# Altium PCB PCB1.PcbDoc
Units mil, origin at the board's own origin, x right, y up, seen from the top; angles counter-clockwise.
Board outline 1920 x 2210 mil, 2 copper layers (Top Layer, Bottom Layer); 8 components, 6 nets, 52 pads, 5 vias.
Unrouted connection lines stored in the file: 8.
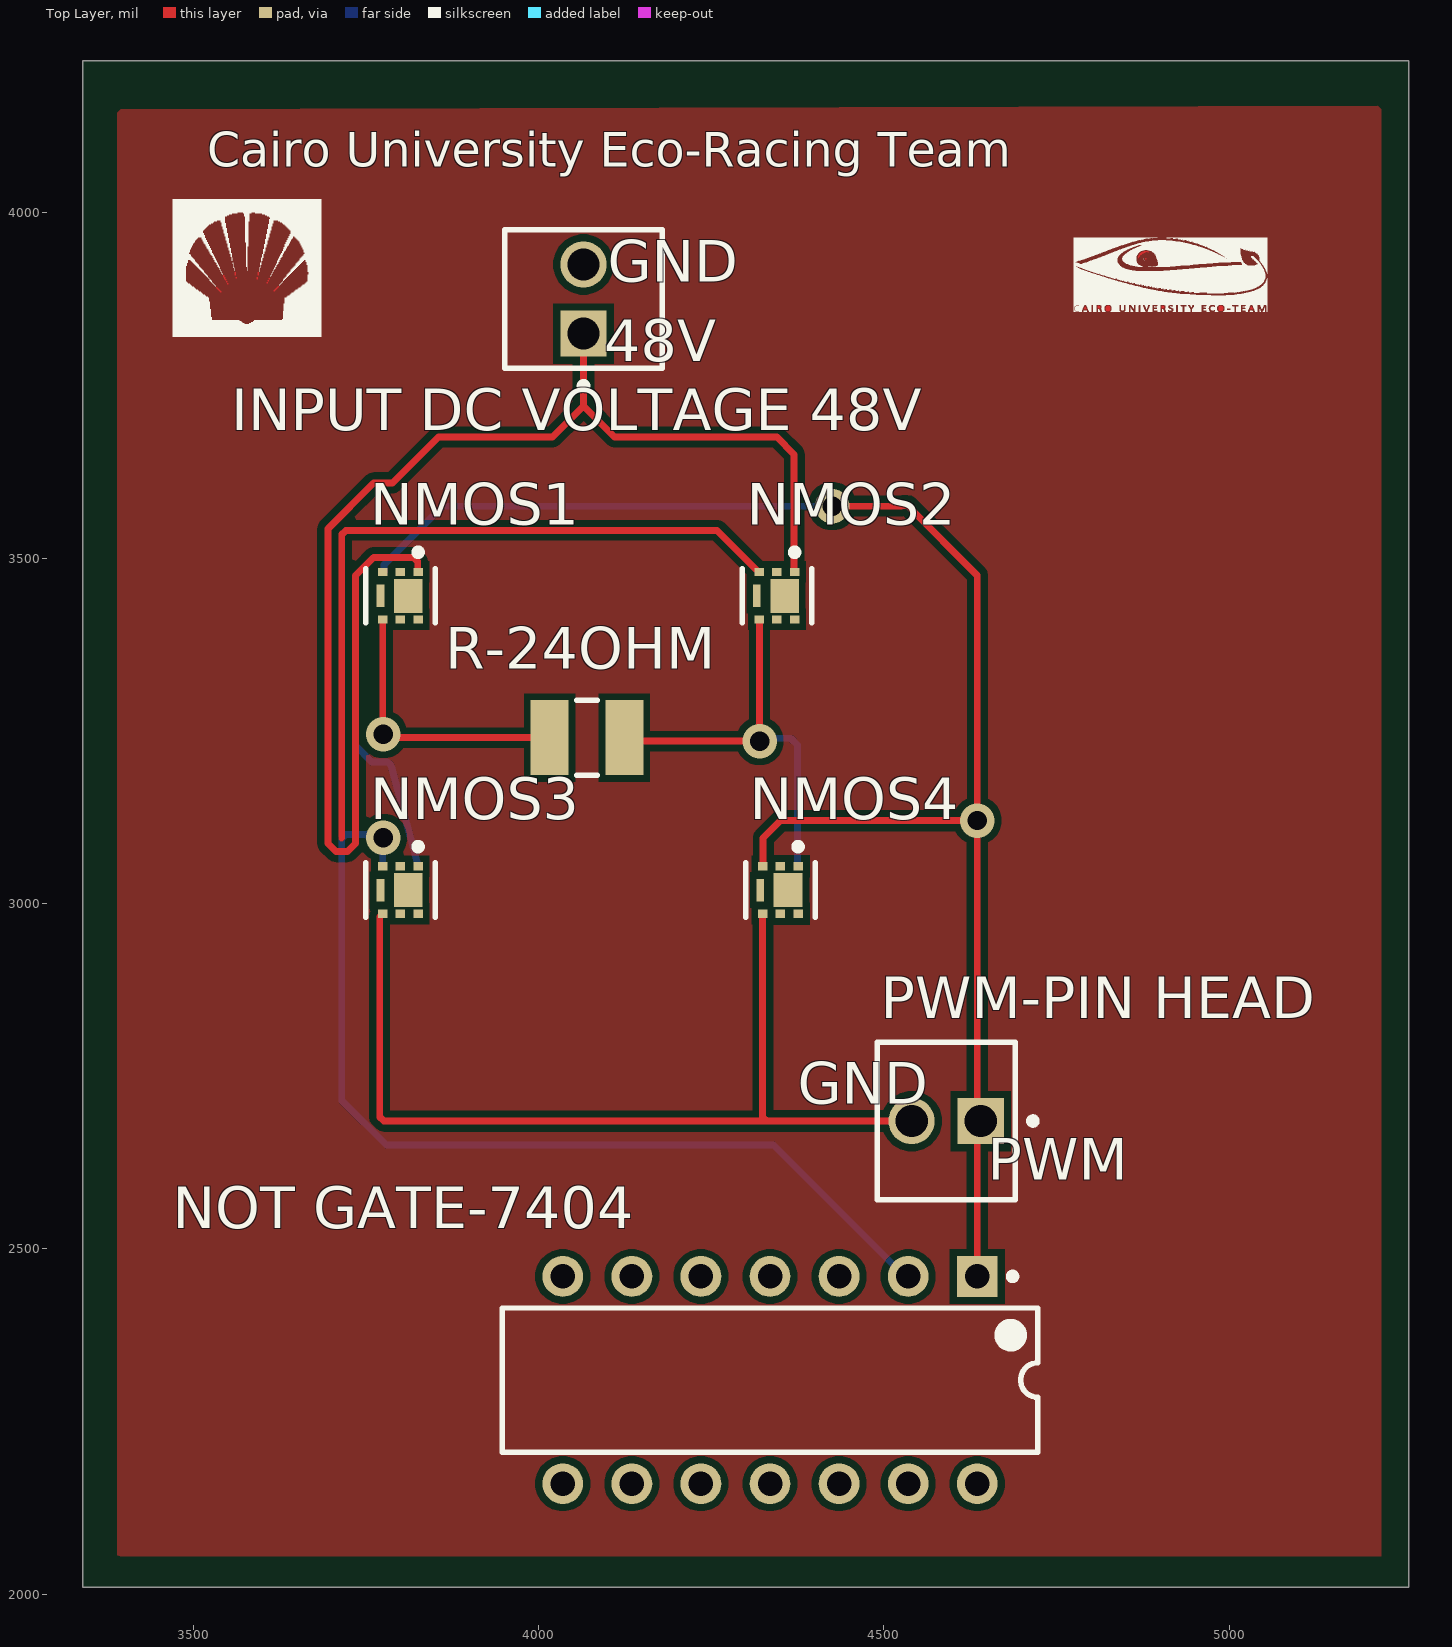
[diagram p0: Top Layer view]
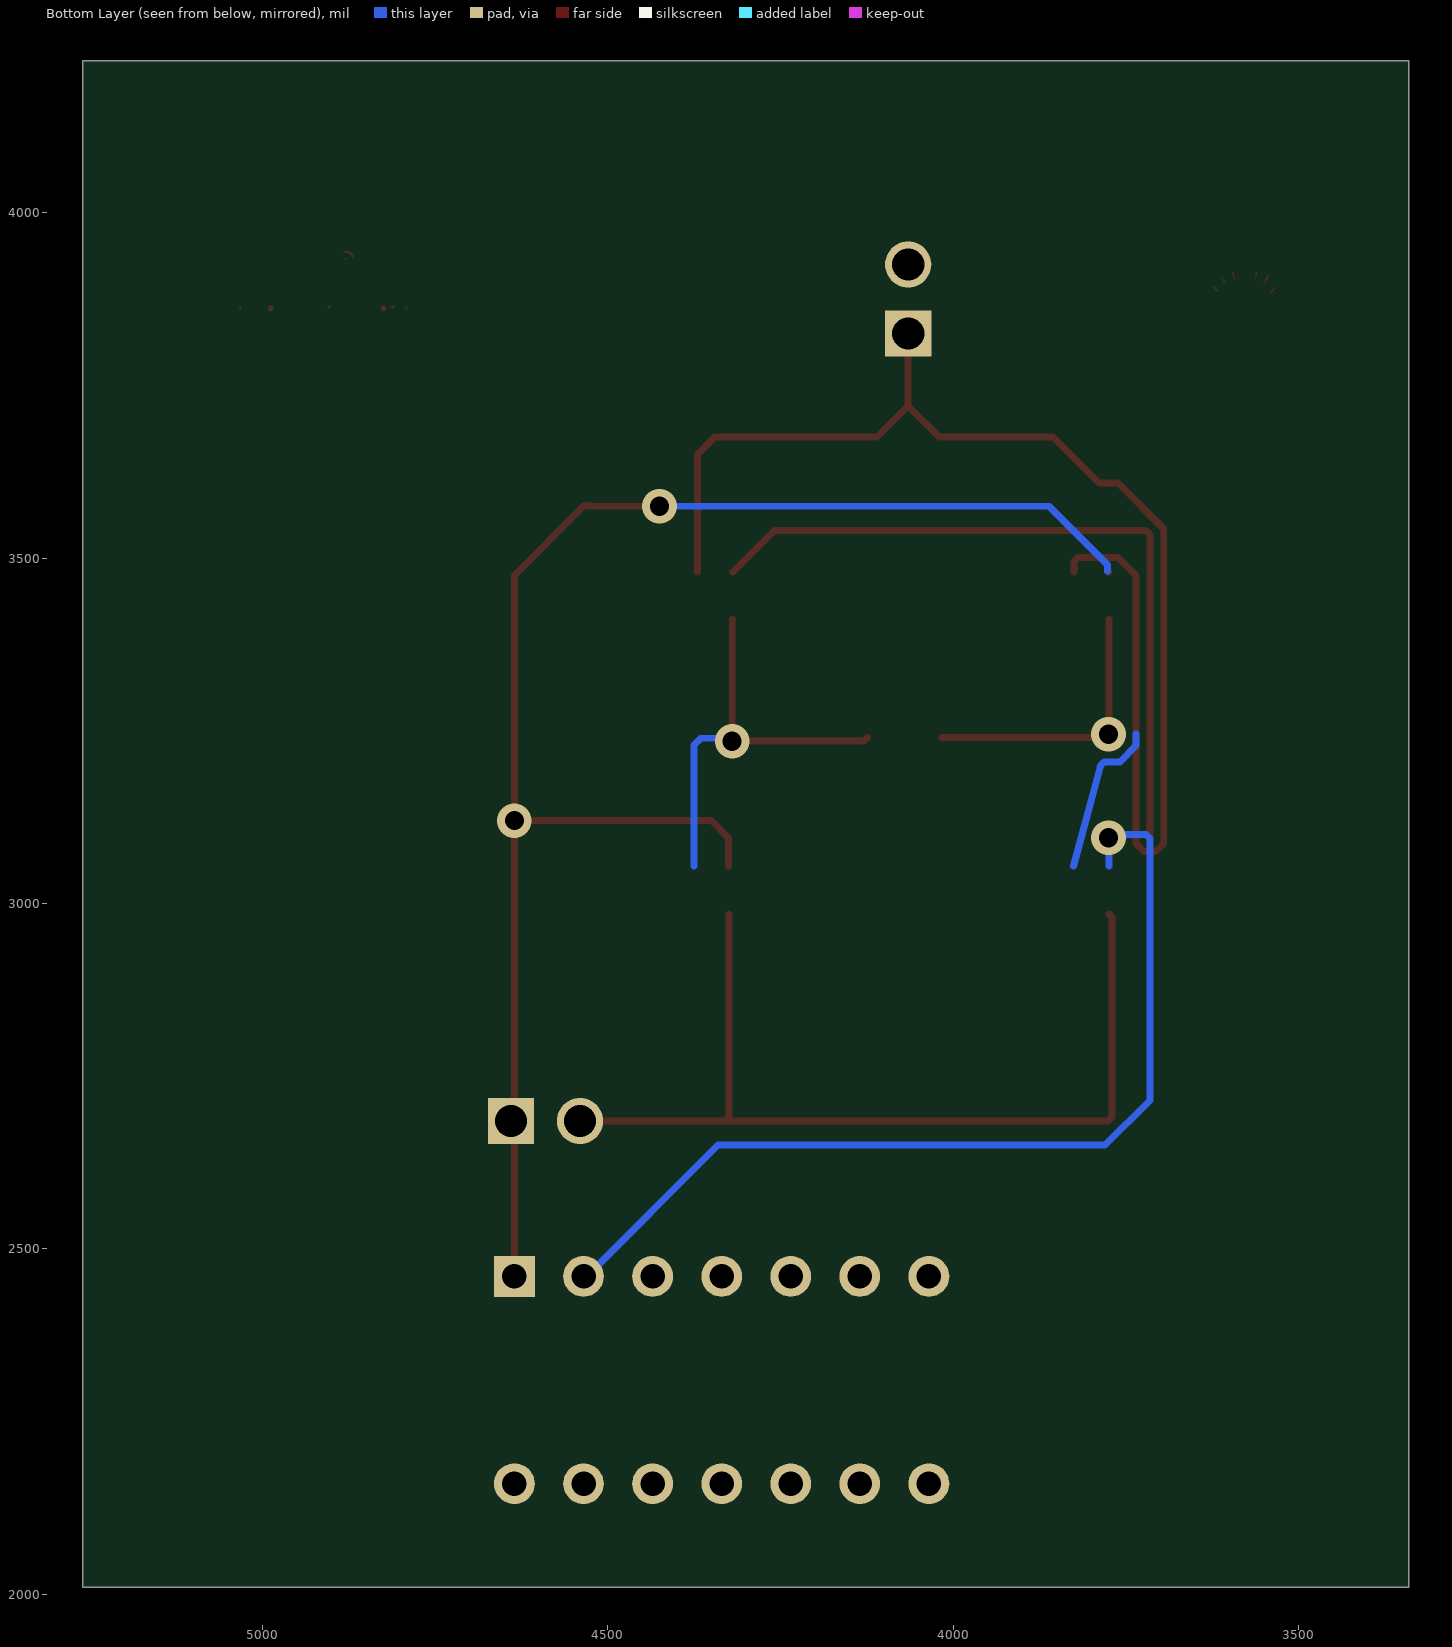
[diagram p1: Bottom Layer view, seen from below]
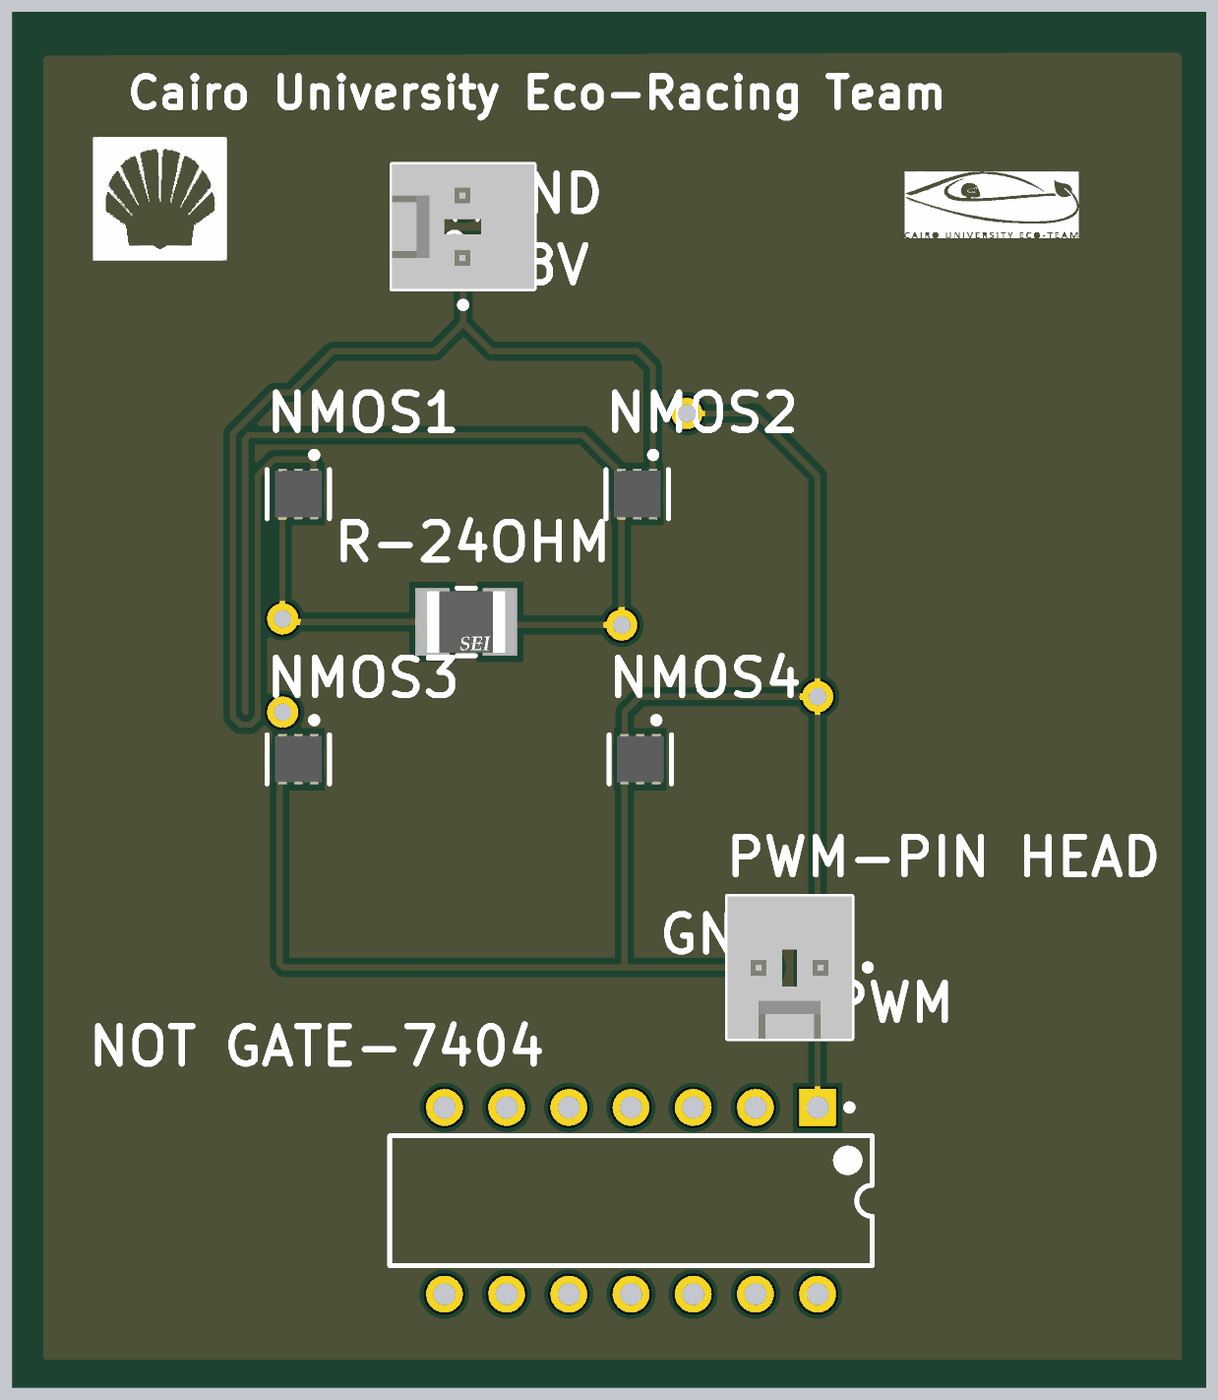
[diagram p2: 3D render of the assembled board from above, using the file's embedded part models]

## Layer stack, top to bottom
Top Solder: solder mask 0.4, Solder Resist, Dk 3.5
Top Layer: signal copper 1.4
Dielectric 1: dielectric 12.6, FR-4, Dk 4.8
Bottom Layer: signal copper 1.4
Bottom Solder: solder mask 0.4, Solder Resist, Dk 3.5

## Board outline
3340,2010 5260,2010 5260,4220 3340,4220

## Design rules (kind name [scope] priority, off if disabled: settings)
Clearance [All] p1: gap=10 ignorepadtopadclearanceinfootprint=FALSE except(0: Arc-Hole Track-Hole SMDPad-Hole THPad-Hole Via-Hole Fill-Hole Poly-Hole Region-Hole Text-Hole)
PolygonConnect [All] p1: connectstyle=Relief reliefconductorwidth=10 reliefentries=4 polygonreliefangle="90 Angle" airgapwidth=10
RoutingVias [All] p1: holewidth=28 width=50 viastyle="Through Hole" minholewidth=28 minwidth=50 maxholewidth=28 maxwidth=50
SolderMaskExpansion [All] p1: expansion=4 istentingtop=FALSE
Width [All] p1: maxlimit=10 minlimit=10 preferedwidth=10
30 further rules are at their usual default settings.

## Classes and differential pairs
component class Sheet1: "INPUT DC VOLTAGE 48V" NMOS1 NMOS2 NMOS4 "NOT GATE-7404" "PWM-PIN HEAD" R-24OHM

## Components (designator, comment, footprint, x,y, rotation, side; value= is the part's Value field where it differs from the comment)
"INPUT DC VOLTAGE 48V" "22-27-2021" PIN 4065,3875 r90 top (schematic designator P1)
NMOS1 "IRL60HS118" NMOS 3800,3445.35 r180 top (schematic designator Q1)
NMOS2 "IRL60HS118" NMOS 4345,3445.35 r180 top (schematic designator Q2)
NMOS3 "IRL60HS118" NMOS 3800,3019.25 r180 top (schematic designator Q3)
NMOS4 "IRL60HS118" NMOS 4350,3019.25 r180 top (schematic designator Q4)
"NOT GATE-7404" "SN74HC04N" NOT 4335,2310 r270 top (schematic designator U1)
"PWM-PIN HEAD" "22-27-2021" PIN 4590,2685 r180 top (schematic designator P2)
R-24OHM "RMCF1210JT24R0" FP-RMCF1210-IPC_B 4070,3240 r0 top (schematic designator R1)

## Footprints (in the part's own frame and the unit in brackets; to place one, negate y for a bottom-side part, rotate by r counter-clockwise, add the part's x,y. Pads: shape width x height; smd on the part's side, far side on the other; paste and mask are expansions set on the pad)
FP-RMCF1210-IPC_B [mil]
  rect 55.27x108.46 smd paste+0 mask+0: 1(-54.16,0) 2(54.16,0)
  silkscreen extent -15,-54 15,54, body extent -92,-64 92,64, height 10
NMOS [mm]
  rect 0.35x0.3 smd paste-1000 mask+0: 1(-0.65,-0.88) 2(0,-0.88) 3(0.65,-0.88) 4(0.65,0.87) 5(0,0.87) 6(-0.65,0.87)
  rect 1.05x1.25 smd paste-1000 mask+0: 7(-0.28,0)
  rect 0.28x0.83 smd paste-1000 mask+0: 8(0.735,0)
  silkscreen extent -1.28,-1.72 1.28,1, body extent -1.15,-1.15 1.15,1.15, height 0.25
NOT [mm] "DIP, 14-Leads, Body 19.7x6.6mm, Pitch 2.54mm"
  rect 1.5x1.5 hole 0.9: 1(-3.81,7.62)
  round 1.5 hole 0.9: 2(-3.81,5.08) 3(-3.81,2.54) 4(-3.81,0) 5(-3.81,-2.54) 6(-3.81,-5.08) 7(-3.81,-7.62) 8(3.81,-7.62) 9(3.81,-5.08) 10(3.81,-2.54) 11(3.81,0) 12(3.81,2.54) 13(3.81,5.08) 14(3.81,7.62)
  silkscreen extent -3.93,-9.85 2.65,9.85, body extent -3.95,-9.85 3.95,9.85, height 5.08
PIN [mm] "Header, 2-Leads, Body 5.8x5.08mm"
  rect 1.7x1.7 hole 1.19: 1(-1.27,0)
  round 1.7 hole 1.19: 2(1.27,0)
  silkscreen extent -3.31,-2.9 2.54,2.9, body extent -2.54,-2.9 2.54,2.9, height 11.72

## Part data
"INPUT DC VOLTAGE 48V" "PWM-PIN HEAD": library part PIN, "Male Header, Pitch 2.54 mm, 1 x 2 Position, Height 11.7 mm, Tail Length 3.56 mm, 0 to 75 degC, RoHS, Bulk", Current - Max=4A, Manufacturer=Molex, Operating temperature=0°Cto+75°C, Package Description="2-Leads Header, Body 5.08 x 5.8 mm, Pitch 2.54 mm", Package Version="Rev. BC, 02/2012", PartNumber=0022272021, Voltage - Max=250V, Contact material=Tinplatedbrass, Current rating=4A, Datasheet URL=http://www.molex.com/pdm_docs/sd/022272021_sd.pdf, Datasheet Version="Rev. F, 06/2009", Housing material=Nylon(UL94V-0), Manufacturer URL=http://www.molex.com/, Mounting Technology=ThroughHole, No. of Positions=2, No. of Rows=1, Orientation=Vertical, Package Reference=22-27-2021, Pitch=2.54mm, Voltage rating=250V
NMOS1 NMOS2 NMOS3 NMOS4: library part NMOS, "MOSFET N-CH 60V 18.5A 6PQFN", Continuous Drain Current (ID)=18.5A, Drain to Source Voltage (Vdss)=60V, Input Capacitance=660pF, Max Operating Temperature=175°C, Max Power Dissipation=11.5W, Min Operating Temperature=-55°C, Halogen Free="Halogen Free", Lead Free="Lead Free", Max Dual Supply Voltage=60V, Mount="Surface Mount", Packaging="Cut Tape", Rds On Max=17mR, RoHS Compliant=Yes
"NOT GATE-7404": library part NOT, "Hex Inverters, N0014A, TUBE", F @ Nom Voltage(Max)(Mhz)=20, Generic Part Number=SN74HC04, ICC @ Nom Voltage(Max)(mA)=0.02, Manufacturer="Texas Instruments", Operating Temperature Range(C)="-40 to 85", Rating=Catalog, Voltage(Nom)(V)=5, Bits(#)=6, Code_JEDEC=MS-001, DatasheetVersion=SCLS078F, Input Type=CMOS, Output Drive (IOL/IOH)(Max)(mA)=-4/4, Output Type=CMOS, PackageReference=N0014A, Schmitt Trigger=No, Technology Family=HC, tpd @ Nom Voltage(Max)(ns)=20, VCC(Max)(V)=6, VCC(Min)(V)=2
R-24OHM: library part RESISTOR, "24Ω ±5% 0.5W 1210 Thick Film Chip Resistor AEC-Q200 compliant", Case/Package=1210, Max Operating Temperature=155°C, Max Power Dissipation=500mW, Min Operating Temperature=-55°C, Resistance=24R, Resistor Type="Thick Film", Temperature Coefficient=200ppm/°C, Tolerance=5%, Contact Plating=Tin, Features="Automotive AEC-Q200", Height=0.028inch, Length=0.126inch, Mount="Surface Mount", Number of Terminations=2, Packaging="Tape and Reel", Radiation Hardening=No, RoHS Compliant=Yes, Series=RMCF, Width=0.098inch

## Via types
v1: diameter 50, hole 28, Top Layer to Bottom Layer, 5 vias

## Nets (pads, with @x,y where several pads share a name; then routed paths per layer and width w, separated by ;. In a path a pad name is that pad's centre, name@x,y a point inside that pad or via, vN(x,y) a via of type N, cw(c..) or ccw(c..) an arc to the next point about the centre after c; other vN are vias at no path point)
NetP1_1: "INPUT DC VOLTAGE 48V.1" NMOS1.1 NMOS2.1 | length 2064.2
  Top Layer w10: NMOS1.1@3825,3480 3825,3495.05 3819.14,3500.91 3761.31,3500.91 3735,3474.6 3735,3086.72 3723.28,3075 3706.72,3075 3695,3086.72 3695,3542.43 3761.29,3608.71 3788.71,3608.71 3855,3675 4020,3675 4065,3720 ; 4065,3825 4065,3720 ; NMOS2.1@4370,3480 4370,3650 4345,3675 4110,3675 4065,3720
NetP2_1: "NOT GATE-7404.1" "PWM-PIN HEAD.1" NMOS1.3 NMOS3.3 | length 3965.7
  Top Layer w10: NMOS1.3 3775.39,3480 NMOS1.3@3776.3,3480.91 ; 4325,3053.9 4325,3095 4350,3120 v1(4635,3120) ; v1(4425,3575) 4525,3575 4525.86,3575.86 4534.14,3575.86 4635,3475 v1(4635,3120) ; 4635,2460 v1(4635,3120)
  Bottom Layer w10: 3735,3245 3735,3228.43 3758.43,3205 3777.45,3205 cw(c3777.45,3195) 3787.11,3197.59 3825.59,3053.9 ; 3774.41,3053.9 3774.41,3075.59 v1@3765,3085 ; v1(3775,3095) v1@3765,3085 ; 3776.3,3480.91 3776.3,3490.31 3860.99,3575 v1(4425,3575) ; 4532.5,2457.5 4340,2650 3780,2650 3715,2715 3715,3094.14 3720.86,3100 3750,3100 v1@3765,3085
NetP2_2: "PWM-PIN HEAD.2" NMOS3.4 NMOS4.4 | length 1371.4
  Top Layer w10: NMOS3.4 3773.43,2985 3772.52,2984.09 3772.52,2983.11 3770,2980.59 3770,2690.86 3775.86,2685 4330.27,2685 ; NMOS4.4 4324.41,2690.86 4330.27,2685 ; 4540,2685 4330.27,2685
NetQ1_4: NMOS1.4 NMOS4.1 R-24OHM.1 | length 409.9
  Top Layer w10: v1@3774.41,3245 3779.41,3240 R-24OHM.1 ; NMOS1.4 3774.41,3245.59 v1(3775,3245)
NetQ2_3: "NOT GATE-7404.2" NMOS2.3 NMOS4.3 | length 1070.8
  Top Layer w10: 3715,3095 3715,3534.14 3720.86,3540 4258.43,3540 4318.43,3480 NMOS2.3
NetQ2_4: NMOS2.4 NMOS3.1 R-24OHM.2 | length 607.7
  Top Layer w10: R-24OHM.2 4129.16,3235 4310,3235 v1@4315,3240 ; NMOS2.4 4319.7,3410.81 4319.7,3240.3 4319.41,3240 4319.41,3235.59 v1(4320,3235)
  Bottom Layer w10: v1(4320,3235) 4324.14,3239.14 4365,3239.14 4375,3229.14 4375,3053.9
pads on no net: "INPUT DC VOLTAGE 48V.2" "NOT GATE-7404.3" "NOT GATE-7404.4" "NOT GATE-7404.5" "NOT GATE-7404.6" "NOT GATE-7404.7" "NOT GATE-7404.8" "NOT GATE-7404.9" "NOT GATE-7404.10" "NOT GATE-7404.11" "NOT GATE-7404.12" "NOT GATE-7404.13" "NOT GATE-7404.14" NMOS1.2 NMOS1.5 NMOS1.6 NMOS1.7 NMOS1.8 NMOS2.2 NMOS2.5 NMOS2.6 NMOS2.7 NMOS2.8 NMOS3.2 NMOS3.5 NMOS3.6 NMOS3.7 NMOS3.8 NMOS4.2 NMOS4.5 NMOS4.6 NMOS4.7 NMOS4.8

## Polygon pours and split planes (outlines as drawn)
no net on Top Layer "NONET_L01_P000" (solid, pour order 0): 3395,4150 3390,4145 3390,2050 3395,2055 5220,2055 5220,4150 5215,4155

## Other copper
Top Layer:
  region: 3609.17,3903.63 3609.17,3905.07 3610.6,3905.07 3610.6,3903.63
  region: 3607.73,3902.2 3609.17,3902.2 3609.17,3900.77 3607.73,3900.77
  region: 3616.33,3887.87 3617.77,3887.87 3617.77,3886.43 3616.33,3886.43
  region: 3591.97,3905.07 3591.97,3906.5 3593.4,3906.5 3593.4,3903.63 3591.97,3903.63
  region: 3593.4,3912.23 3593.4,3913.67 3594.83,3913.67 3594.83,3909.37 3593.4,3909.37 3593.4,3910.8
  region: 3622.07,3892.17 3622.07,3890.73 3620.63,3890.73 3620.63,3892.17
  region: 3619.2,3889.3 3619.2,3890.73 3620.63,3890.73 3620.63,3889.3
  region: 3623.5,3893.6 3623.5,3892.17 3622.07,3892.17 3622.07,3893.6
  region: 3619.2,3889.3 3619.2,3887.87 3617.77,3887.87 3617.77,3889.3
  region: 3607.73,3899.33 3607.73,3897.9 3606.3,3897.9 3606.3,3899.33
  region: 3548.97,3896.47 3548.97,3897.9 3550.4,3897.9 3550.4,3896.47
  region: 3536.07,3890.73 3536.07,3889.3 3534.63,3889.3 3534.63,3890.73 3533.2,3890.73 3533.2,3892.17 3534.63,3892.17 3534.63,3890.73
  region: 3538.93,3887.87 3538.93,3886.43 3537.5,3886.43 3537.5,3887.87 3536.07,3887.87 3536.07,3889.3 3537.5,3889.3 3537.5,3887.87
  region: 3561.87,3906.5 3563.3,3906.5 3563.3,3905.07 3561.87,3905.07
  region: 3543.23,3907.93 3543.23,3909.37 3544.67,3909.37 3544.67,3906.5 3543.23,3906.5
  region: 3544.67,3903.63 3544.67,3906.5 3546.1,3906.5 3546.1,3903.63 3547.53,3903.63 3547.53,3902.2 3546.1,3902.2 3546.1,3903.63
  region: 3548.97,3900.77 3548.97,3899.33 3547.53,3899.33 3547.53,3900.77
  region: 3561.87,3913.67 3561.87,3909.37 3560.43,3909.37 3560.43,3913.67
  region: 3538.93,3886.43 3540.37,3886.43 3540.37,3885 3538.93,3885
  region: 4878.05,3933.18 4878.36,3933.18 4878.36,3933.49 4878.68,3933.49 4878.68,3933.8 4879.61,3933.8 4879.61,3932.55 4879.3,3932.55 4879.3,3932.24 4878.68,3932.24 4878.68,3932.55 4878.36,3932.55 4878.36,3932.87 4878.05,3932.87
  region: 5032.6,3859.97 5030.1,3859.97 5030.1,3860.91 5030.41,3860.91 5030.41,3861.22 5030.72,3861.22 5030.72,3862.16 5031.03,3862.16 5031.03,3862.79 5031.35,3862.79 5031.35,3863.73 5031.66,3863.73 5031.66,3864.04 5031.97,3864.04 5031.97,3863.73 5032.28,3863.73 5032.28,3862.79 5032.6,3862.79 5032.6,3862.16 5032.91,3862.16 5032.91,3861.22 5033.22,3861.22 5033.22,3860.6 5033.54,3860.6 5033.54,3859.97 5032.91,3859.97
  region: 4902.14,3864.04 4902.14,3864.66 4903.39,3864.66 4903.39,3864.98 4903.7,3864.98 4903.7,3864.66 4904.96,3864.66 4904.96,3864.35 4905.27,3864.35 4905.27,3863.73 4905.58,3863.73 4905.58,3862.79 4905.27,3862.79 4905.27,3862.47 4904.96,3862.47 4904.96,3862.16 4904.33,3862.16 4904.33,3861.85 4902.14,3861.85 4902.14,3863.73
  region: 4809.54,3863.41 4809.54,3864.66 4809.85,3864.66 4809.85,3864.98 4810.47,3864.98 4810.47,3864.66 4810.79,3864.66 4810.79,3864.98 4811.1,3864.98 4811.1,3864.66 4812.35,3864.66 4812.35,3864.35 4812.66,3864.35 4812.66,3864.04 4812.98,3864.04 4812.98,3863.73 4813.29,3863.73 4813.29,3863.1 4812.98,3863.1 4812.98,3862.47 4812.35,3862.47 4812.35,3862.16 4812.04,3862.16 4812.04,3861.85 4809.85,3861.85 4809.85,3862.16 4809.54,3862.16 4809.54,3863.1
  region: 4825.8,3858.09 4825.8,3857.78 4824.55,3857.78 4824.55,3857.47 4823.93,3857.47 4823.93,3857.78 4822.68,3857.78 4822.68,3858.09 4822.05,3858.09 4822.05,3858.41 4821.74,3858.41 4821.74,3859.03 4821.42,3859.03 4821.42,3859.97 4821.11,3859.97 4821.11,3862.47 4821.42,3862.47 4821.42,3863.41 4821.74,3863.41 4821.74,3863.73 4822.05,3863.73 4822.05,3864.04 4822.36,3864.04 4822.36,3864.35 4822.68,3864.35 4822.68,3864.66 4823.61,3864.66 4823.61,3864.98 4825.49,3864.98 4825.49,3864.66 4826.12,3864.66 4826.12,3864.35 4826.74,3864.35 4826.74,3864.04 4827.06,3864.04 4827.06,3863.41 4827.37,3863.41 4827.37,3862.79 4827.68,3862.79 4827.68,3859.97 4827.37,3859.97 4827.37,3859.03 4827.06,3859.03 4827.06,3858.72 4826.74,3858.72 4826.74,3858.41 4826.43,3858.41 4826.43,3858.09 4826.12,3858.09
  region: 4869.92,3939.75 4870.23,3939.75 4870.23,3940.37 4870.54,3940.37 4870.54,3940.69 4870.85,3940.69 4870.85,3941 4871.17,3941 4871.17,3941.31 4871.79,3941.31 4871.79,3941.63 4872.11,3941.63 4872.11,3941.94 4872.73,3941.94 4872.73,3942.25 4873.04,3942.25 4873.04,3942.56 4873.98,3942.56 4873.98,3942.88 4874.61,3942.88 4874.61,3943.19 4875.55,3943.19 4875.55,3943.5 4877.11,3943.5 4877.11,3943.82 4881.18,3943.82 4881.18,3943.5 4883.06,3943.5 4883.06,3942.88 4882.43,3942.88 4882.43,3943.19 4882.12,3943.19 4882.12,3942.88 4878.68,3942.88 4878.68,3942.56 4877.74,3942.56 4877.74,3942.25 4876.49,3942.25 4876.49,3941.94 4875.86,3941.94 4875.86,3941.63 4874.92,3941.63 4874.92,3941.31 4874.3,3941.31 4874.3,3941 4873.98,3941 4873.98,3940.69 4873.36,3940.69 4873.36,3940.37 4873.04,3940.37 4873.04,3940.06 4872.42,3940.06 4872.42,3939.44 4871.79,3939.44 4871.79,3939.12 4871.48,3939.12 4871.48,3938.81 4871.17,3938.81 4871.17,3938.5 4870.85,3938.5 4870.85,3938.18 4870.54,3938.18 4870.54,3937.87 4870.23,3937.87 4870.23,3937.56 4869.92,3937.56 4869.92,3936.93 4869.6,3936.93 4869.6,3936.62 4869.29,3936.62 4869.29,3935.99 4868.98,3935.99 4868.98,3935.37 4868.66,3935.37 4868.66,3934.43 4868.35,3934.43 4868.35,3933.8 4868.04,3933.8 4868.04,3935.99 4868.35,3935.99 4868.35,3936.93 4868.66,3936.93 4868.66,3937.87 4868.98,3937.87 4868.98,3938.5 4869.29,3938.5 4869.29,3938.81 4869.6,3938.81 4869.6,3939.44 4869.92,3939.44
  region: 4791.7,3863.1 4791.7,3862.79 4792.02,3862.79 4792.02,3862.16 4792.33,3862.16 4792.33,3861.54 4792.64,3861.54 4792.64,3860.6 4792.96,3860.6 4792.96,3859.97 4789.83,3859.97 4789.83,3861.22 4790.14,3861.22 4790.14,3861.85 4790.45,3861.85 4790.45,3862.47 4790.77,3862.47 4790.77,3863.41 4791.08,3863.41 4791.08,3864.04 4791.39,3864.04 4791.39,3863.73 4791.7,3863.73 4791.7,3863.41
  region: 4985.36,3864.35 4985.98,3864.35 4985.98,3864.66 4986.61,3864.66 4986.61,3864.98 4988.49,3864.98 4988.49,3864.66 4989.42,3864.66 4989.42,3864.35 4989.74,3864.35 4989.74,3864.04 4990.05,3864.04 4990.05,3863.73 4990.36,3863.73 4990.36,3863.1 4990.68,3863.1 4990.68,3862.16 4990.99,3862.16 4990.99,3860.6 4990.68,3860.6 4990.68,3859.35 4990.36,3859.35 4990.36,3858.72 4990.05,3858.72 4990.05,3858.41 4989.74,3858.41 4989.74,3858.09 4989.11,3858.09 4989.11,3857.78 4985.98,3857.78 4985.98,3858.09 4985.36,3858.09 4985.36,3858.41 4985.04,3858.41 4985.04,3858.72 4984.73,3858.72 4984.73,3859.35 4984.42,3859.35 4984.42,3862.79 4984.73,3862.79 4984.73,3863.73 4985.04,3863.73 4985.04,3864.04 4985.36,3864.04

## Silkscreen, mask and mechanical layers (free items; w line width, h text height)
Top Overlay:
  drawing of 2 lines, arcs and shapes, not listed
  text "Cairo University Eco-Racing Team" at 3520,4066.66 h50
  text "GND" at 4100,3900 h60
  text "48V" at 4095,3785 h60
  text "GND" at 4375,2710 h60
  text "PWM" at 4650,2600 h60